# Altium PCB INA288.PcbDoc
Units mm, origin at the board's own origin, x right, y up, seen from the top; angles counter-clockwise.
Board outline 152.4 x 101.6 mm, 2 copper layers (Top Layer, Bottom Layer); 24 components, 10 nets, 70 pads, 0 vias.
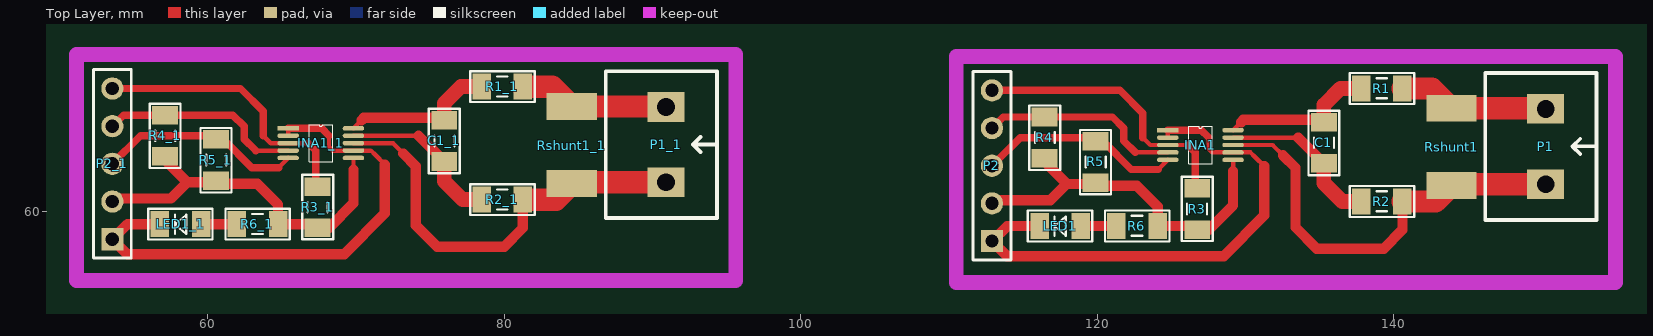
[diagram p0: Top Layer view]
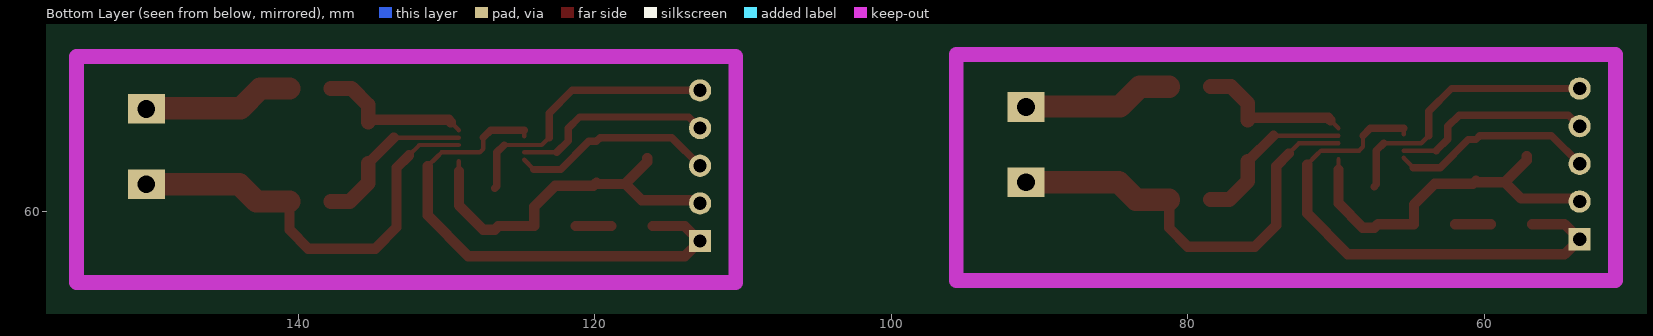
[diagram p1: Bottom Layer view, seen from below]
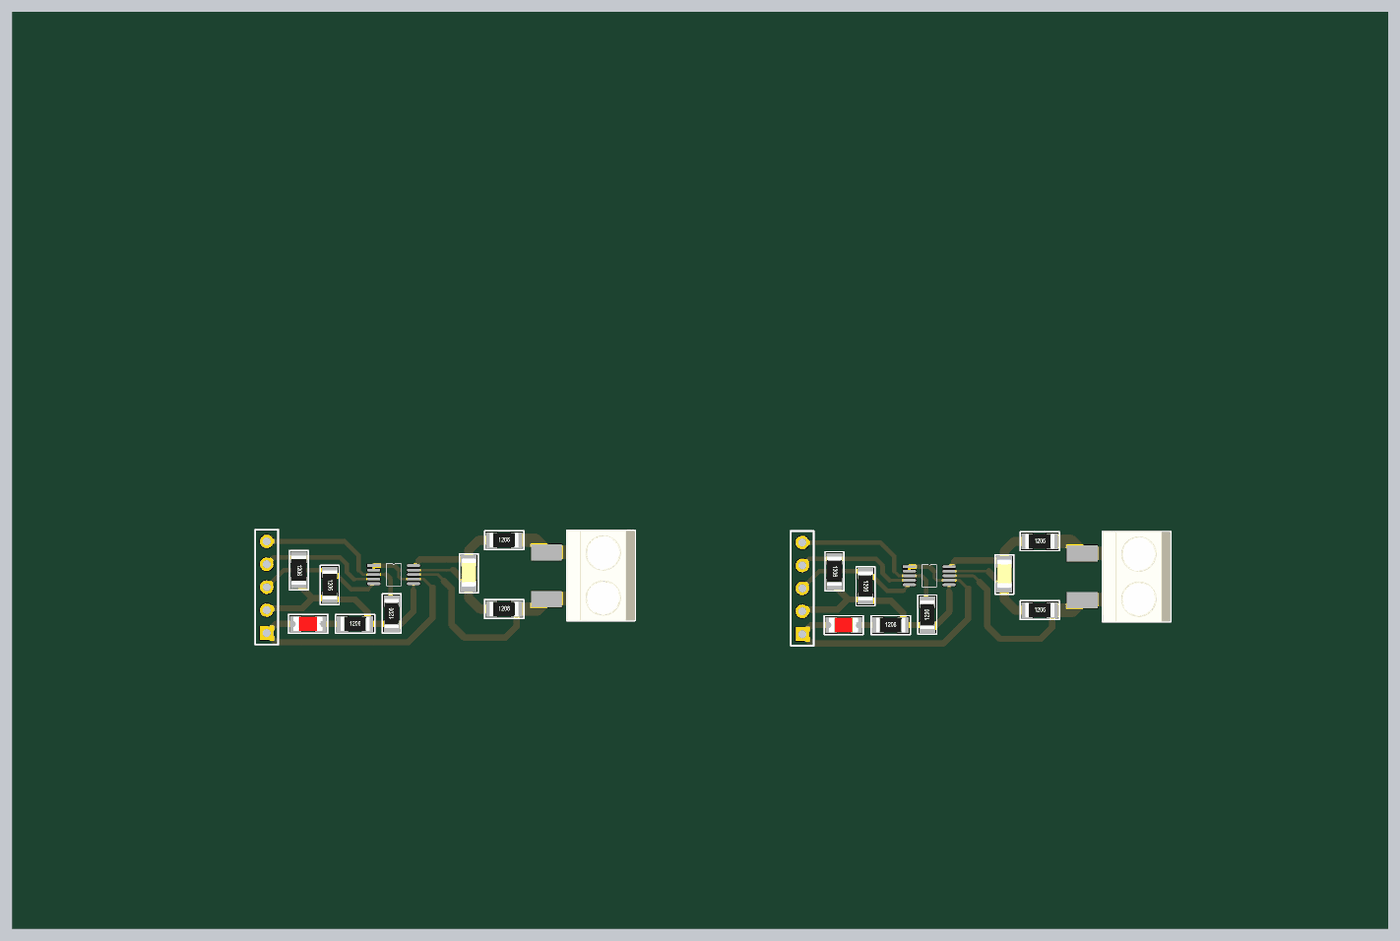
[diagram p2: 3D render of the assembled board from above, using the file's embedded part models]

## Layer stack, top to bottom
Top Solder: solder mask 0.0102, Solder Resist, Dk 3.5
Top Layer: signal copper 0.0356
Dielectric 1: dielectric 0.32, FR-4, Dk 4.8
Bottom Layer: signal copper 0.0356
Bottom Solder: solder mask 0.0102, Solder Resist, Dk 3.5

## Board outline
25.4,25.4 177.8,25.4 177.8,127 25.4,127

## Design rules (kind name [scope] priority, off if disabled: settings)
Clearance [All] p1: gap=0.5 ignorepadtopadclearanceinfootprint=FALSE
PolygonConnect [All] p1: connectstyle=Relief reliefconductorwidth=0.254 reliefentries=4 polygonreliefangle="90 Angle" airgapwidth=0.254
RoutingVias [All] p1: holewidth=0.711 width=1.27 viastyle="Through Hole" minholewidth=0.711 minwidth=1.27 maxholewidth=0.711 maxwidth=1.27
SolderMaskExpansion [All] p1: expansion=0.102
Width [All] p1: maxlimit=1.5 minlimit=0.3 preferedwidth=0.7
30 further rules are at their usual default settings.

## Classes and differential pairs
component class INA288: C1 INA1 LED1 P1 P2 R1 R2 R3 R4 R5 R6 Rshunt1

## Components (designator, comment, footprint, x,y, rotation, side; value= is the part's Value field where it differs from the comment)
C1 "100pF" "tu 1206" 135.255,64.643 r270 top
C1_1 "100pF" "tu 1206" 75.946,64.77 r270 top (schematic designator C1)
INA1 "INA228" INA228 124.759,65.516 r0 top
INA1_1 "INA228" INA228 65.45,65.643 r0 top (schematic designator INA1)
LED1 "Led Xanh Duong 1206" "led 1206" 117.475,59.055 r180 top
LED1_1 "Led Xanh Duong 1206" "led 1206" 58.166,59.182 r180 top (schematic designator LED1)
P1 "Header 2 - M" "Medium - Header 2" 150.241,64.413 r270 top
P1_1 "Header 2 - M" "Medium - Header 2" 90.932,64.54 r270 top (schematic designator P1)
P2 "Header 5P" HDR1X5 112.903,58.039 r90 top
P2_1 "Header 5P" HDR1X5 53.594,58.166 r90 top (schematic designator P2)
R1 "1R (1206)" "TRO 1206" 139.192,68.326 r0 top
R1_1 "1R (1206)" "TRO 1206" 79.883,68.453 r0 top (schematic designator R1)
R2 "1R (1206)" "TRO 1206" 139.192,60.706 r0 top
R2_1 "1R (1206)" "TRO 1206" 79.883,60.833 r0 top (schematic designator R2)
R3 "10k (1206-1%)" "TRO 1206" 126.746,60.198 r90 top
R3_1 "10k (1206-1%)" "TRO 1206" 67.437,60.325 r90 top (schematic designator R3)
R4 "10k (1206-1%)" "TRO 1206" 116.459,65.016 r270 top
R4_1 "10k (1206-1%)" "TRO 1206" 57.15,65.143 r270 top (schematic designator R4)
R5 "10k (1206-1%)" "TRO 1206" 119.888,63.373 r270 top
R5_1 "10k (1206-1%)" "TRO 1206" 60.579,63.5 r270 top (schematic designator R5)
R6 "680R (1206)" "TRO 1206" 122.682,59.055 r0 top
R6_1 "680R (1206)" "TRO 1206" 63.373,59.182 r0 top (schematic designator R6)
Rshunt1 "Rshunt2512" Rshunt2512 143.891,64.389 r270 top
Rshunt1_1 "Rshunt2512" Rshunt2512 84.582,64.516 r270 top (schematic designator Rshunt1)

## Footprints (in the part's own frame and the unit in brackets; to place one, negate y for a bottom-side part, rotate by r counter-clockwise, add the part's x,y. Pads: shape width x height; smd on the part's side, far side on the other; paste and mask are expansions set on the pad)
HDR1X5 [mm] "Connector; Header; 5 Position"
  rect 1.5x1.5 hole 0.9: 1(0,0)
  round 1.5 hole 0.9: 2(2.54,0) 3(5.08,0) 4(7.62,0) 5(10.16,0)
  silkscreen extent -1.27,-1.27 11.43,1.27, body extent -1.27,-1.27 11.43,1.27, height 7
INA228 [mm]
  rect 1.45x0.3 smd: 1(0,0)
  oval 1.45x0.3 smd: 2(0,-0.5) 3(0,-1) 4(0,-1.5) 5(0,-2) 6(4.4,-2) 7(4.4,-1.5) 8(4.4,-1) 9(4.4,-0.5) 10(4.4,0)
  silkscreen extent 1.41,-2.25 2.99,0.25
"led 1206" [mm]
  rect 1.25x1.75 smd: 1(-1.415,0) 2(1.365,0)
  silkscreen extent -2.18,-1.04 2.16,1.04, body extent -1.6,-0.8 1.6,0.8, height 1.1
"Medium - Header 2" [mm]
  rect 2x2.5 hole 1.2: 1(-2.54,0) 2(2.54,0)
  silkscreen extent -4.95,-4.08 4.95,3.43, body extent -5,-4.07 5,3.43, height 10
Rshunt2512 [mm]
  rect 1.8x3.4 smd: 1(-2.6,0) 2(2.6,0)
"TRO 1206" [mm]
  rect 1.25x1.75 smd: 1(-1.39,0) 2(1.39,0)
  silkscreen extent -2.16,-1.04 2.18,1.04, body extent -1.6,-0.8 1.6,0.8, height 0.6
"tu 1206" [mm]
  rect 1.25x1.75 smd: 1(-1.415,0.025) 2(1.365,0.025)
  silkscreen extent -2.18,-1.02 2.16,1.07, body extent -1.7,-0.77 1.5,0.83, height 0.94

## Part data
C1 C1_1: library part "Tu 1206 100pF 50V 5%", "Dán", Chung_Loai=Dán, Don_Vi=Con, Ma_Hang=MH008101, So_Chan=2, Ten_Linh_Kien="T? 1206 100P 5% 50V"
LED1 LED1_1: library part "Led 1206 Xanh Duong", "Dán", Chung_Loai=Dán, Don_Vi=Con, Kieu_Chan=1206, Ma_Hang=MH002333, So_Chan=2, Ten_Linh_Kien="LED 1206 Màu Xanh Duong (Blue)"
P1 P1_1: "Header, 2-Pin, Medium", LatestRevisionDate=17-Jul-2002, LatestRevisionNote="Re-released for DXP Platform.", Publisher="Altium Limited"
P2 P2_1: library part "Header 5x1", "Header, 5 Pin Pitch 2.54mm", MPN=S1012EC-40-ND, CompanyID=VT-00125, Solder=WAVE
R1 R1_1 R2 R2_1: library part "Tro 1206 5% 1R", "Dán", Chung_Loai=Dán, Don_Vi=Con, Ma_Hang=MH005905, So_Chan=2, Ten_Linh_Kien="Tr? 1206 5% 1R"
R3 R3_1 R4 R4_1 R5 R5_1: library part "Tro 1206 1% 10k", "Dán", Chung_Loai=Dán, Don_Vi=Con, Ma_Hang=MH005885, So_Chan=2, Ten_Linh_Kien="Tr? 1206 1% 10k"
R6 R6_1: library part "Tro 1206 5% 680R", "Dán", Chung_Loai=Dán, Don_Vi=Con, Ma_Hang=MH005928, So_Chan=2, Ten_Linh_Kien="Tr? 1206 5% 680R"

## Nets (pads, with @x,y where several pads share a name; then routed paths per layer and width w, separated by ;. In a path a pad name is that pad's centre, name@x,y a point inside that pad or via, vN(x,y) a via of type N, cw(c..) or ccw(c..) an arc to the next point about the centre after c; other vN are vias at no path point)
+5V: INA1.6 P2.2 R3.1 R4.2 R5.2 R6.2 | length 25
  Top Layer w0.3: 129.159,62.738 INA1.6@129.159,63.416
  Top Layer w0.7: P2.2 112.903,60.78 116.835,60.78 117.944,61.888 ; R4.2 116.459,63.373 117.944,61.888 ; 129.159,62.738 129.159,60.452 127.515,58.808 R3.1 126.499,59.055 R6.2 124.072,60.361 122.668,61.765 120.106,61.765 R5.2 119.793,61.888 117.944,61.888
GND: INA1.1 INA1.2 INA1.7 LED1.2 P2.1 | length 35.2
  Top Layer w0.3: INA1.2@124.759,65.116 INA1.1 ; 127.508,65.024 127.508,64.27 127.762,64.016 INA1.7 130.335,64.016 130.621,63.73 131.275,63.076
  Top Layer w0.5: INA1.1 127.016,65.516 127.508,65.024
  Top Layer w0.7: LED1.2 113.919,59.055 P2.1 113.919,57.023 128.524,57.023 131.275,59.774 131.275,63.076
NetC1_1: C1.1 INA1.10 R1.1 | length 10.6
  Top Layer w0.3: INA1.10 129.701,66.058
  Top Layer w0.7: 129.701,66.058 129.859,66.216 135.123,66.216 C1.1
  Top Layer w1: C1.1 135.28,67.208 136.398,68.326 R1.1
NetC1_2: C1.2 INA1.9 R2.1 | length 11.2
  Top Layer w0.3: INA1.9 133.543,65.016
  Top Layer w0.7: 133.543,65.016 C1.2
  Top Layer w1: C1.2 135.28,61.951 136.525,60.706 R2.1
NetINA1_3: INA1.3 P2.5 R3.2 | length 18.9
  Top Layer w0.3: 123.07,65.017 123.571,64.516 INA1.3 126.111,64.516
  Top Layer w0.5: P2.5 121.539,68.199 123.07,66.668 123.07,65.017 ; 126.111,64.516 126.608,64.019 126.608,61.726 R3.2
NetINA1_4: INA1.4 P2.4 R4.1 | length 13.7
  Top Layer w0.3: 122.564,64.016 INA1.4
  Top Layer w0.5: P2.4 113.651,66.407 R4.1 R4.1 121.031,66.406 121.793,65.644 121.793,64.787 122.564,64.016
NetINA1_5: INA1.5 P2.3 R5.1 | length 13.8
  Top Layer w0.3: 124.108,62.865 INA1.5
  Top Layer w0.5: P2.3 114.8,65.016 119.635,65.016 R5.1 120.403,64.763 122.301,62.865 124.108,62.865
NetINA1_8: INA1.8 P1.2 R2.2 Rshunt1.2 | length 29.2
  Top Layer w0.3: INA1.8 131.826,64.516 132.524,63.817
  Top Layer w0.7: 132.524,63.817 133.37,62.972 133.37,58.974 134.813,57.531 139.319,57.531 140.582,58.794 R2.2
  Top Layer w1.5: R2.2 142.808,60.706 Rshunt1.2 143.975,61.873 P1.2
NetLED1_1: LED1.1 R6.1 | length 2.4
  Top Layer w0.7: LED1.1 R6.1
NetP1_1: P1.1 R1.2 Rshunt1.1 | length 10.2
  Top Layer w1.5: R1.2 142.554,68.326 Rshunt1.1 150.205,66.989 P1.1
pads on no net: C1_1.1 C1_1.2 INA1_1.1 INA1_1.2 INA1_1.3 INA1_1.4 INA1_1.5 INA1_1.6 INA1_1.7 INA1_1.8 INA1_1.9 INA1_1.10 LED1_1.1 LED1_1.2 P1_1.1 P1_1.2 P2_1.1 P2_1.2 P2_1.3 P2_1.4 P2_1.5 R1_1.1 R1_1.2 R2_1.1 R2_1.2 R3_1.1 R3_1.2 R4_1.1 R4_1.2 R5_1.1 R5_1.2 R6_1.1 R6_1.2 Rshunt1_1.1 Rshunt1_1.2
copper on no net: | length 170.3
  Top Layer w0.3: 63.255,64.143 65.45,64.143 ; 63.761,65.144 64.262,64.643 65.45,64.643 66.802,64.643 ; 64.799,62.992 65.45,63.643 ; 65.45,65.243 65.45,65.643 ; 68.199,65.151 68.199,64.397 68.453,64.143 69.85,64.143 71.026,64.143 71.312,63.857 71.966,63.203 ; 69.85,62.865 69.85,63.543 ; 69.85,64.643 72.517,64.643 73.215,63.944 ; 69.85,65.143 74.234,65.143 ; 69.85,65.643 70.392,66.185
  Top Layer w0.5: 53.594,63.246 55.491,65.143 60.326,65.143 60.579,64.89 61.094,64.89 62.992,62.992 64.799,62.992 ; 53.594,65.786 54.342,66.534 57.149,66.534 57.15,66.533 61.722,66.533 62.484,65.771 62.484,64.914 63.255,64.143 ; 53.594,68.326 62.23,68.326 63.761,66.795 63.761,65.144 ; 65.45,65.643 67.707,65.643 68.199,65.151 ; 66.802,64.643 67.299,64.146 67.299,61.853 67.437,61.715
  Top Layer w0.7: 53.594,60.706 53.594,60.907 57.526,60.907 58.635,62.015 ; 56.801,59.182 54.61,59.182 53.594,58.166 54.61,57.15 69.215,57.15 71.966,59.901 71.966,63.203 ; 57.15,63.753 57.15,63.5 58.635,62.015 ; 59.581,59.182 61.983,59.182 ; 69.85,62.865 69.85,60.579 68.206,58.935 67.437,58.935 67.19,59.182 64.763,59.182 64.763,60.488 63.359,61.892 60.797,61.892 60.579,62.11 60.484,62.015 58.635,62.015 ; 70.392,66.185 70.55,66.343 75.814,66.343 75.971,66.185 ; 73.215,63.944 74.061,63.099 74.061,59.101 75.504,57.658 80.01,57.658 81.273,58.921 81.273,60.833 ; 74.234,65.143 75.971,63.405
  Top Layer w1: 75.971,63.405 75.971,62.078 77.216,60.833 78.493,60.833 ; 75.971,66.185 75.971,67.335 77.089,68.453 78.493,68.453
  Top Layer w1.5: 81.273,60.833 83.499,60.833 84.582,61.916 84.666,62 90.932,62 ; 81.273,68.453 83.245,68.453 84.582,67.116 90.896,67.116 90.932,67.08

## Keep-outs
Keep-Out Layer:
  lines w1: 51.181,55.372 95.631,55.372 95.631,56.007 95.631,70.612 51.181,70.612 51.181,55.372 ; 110.49,55.245 110.49,70.485 154.94,70.485 154.94,55.88 154.94,55.245 110.49,55.245